# Altium PCB AT86RF231.PcbDoc
Units mil, origin at the board's own origin, x right, y up, seen from the top; angles counter-clockwise.
Board outline 1140 x 1310 mil, 2 copper layers (Top Layer, Bottom Layer); 16 components, 20 nets, 79 pads, 66 vias.
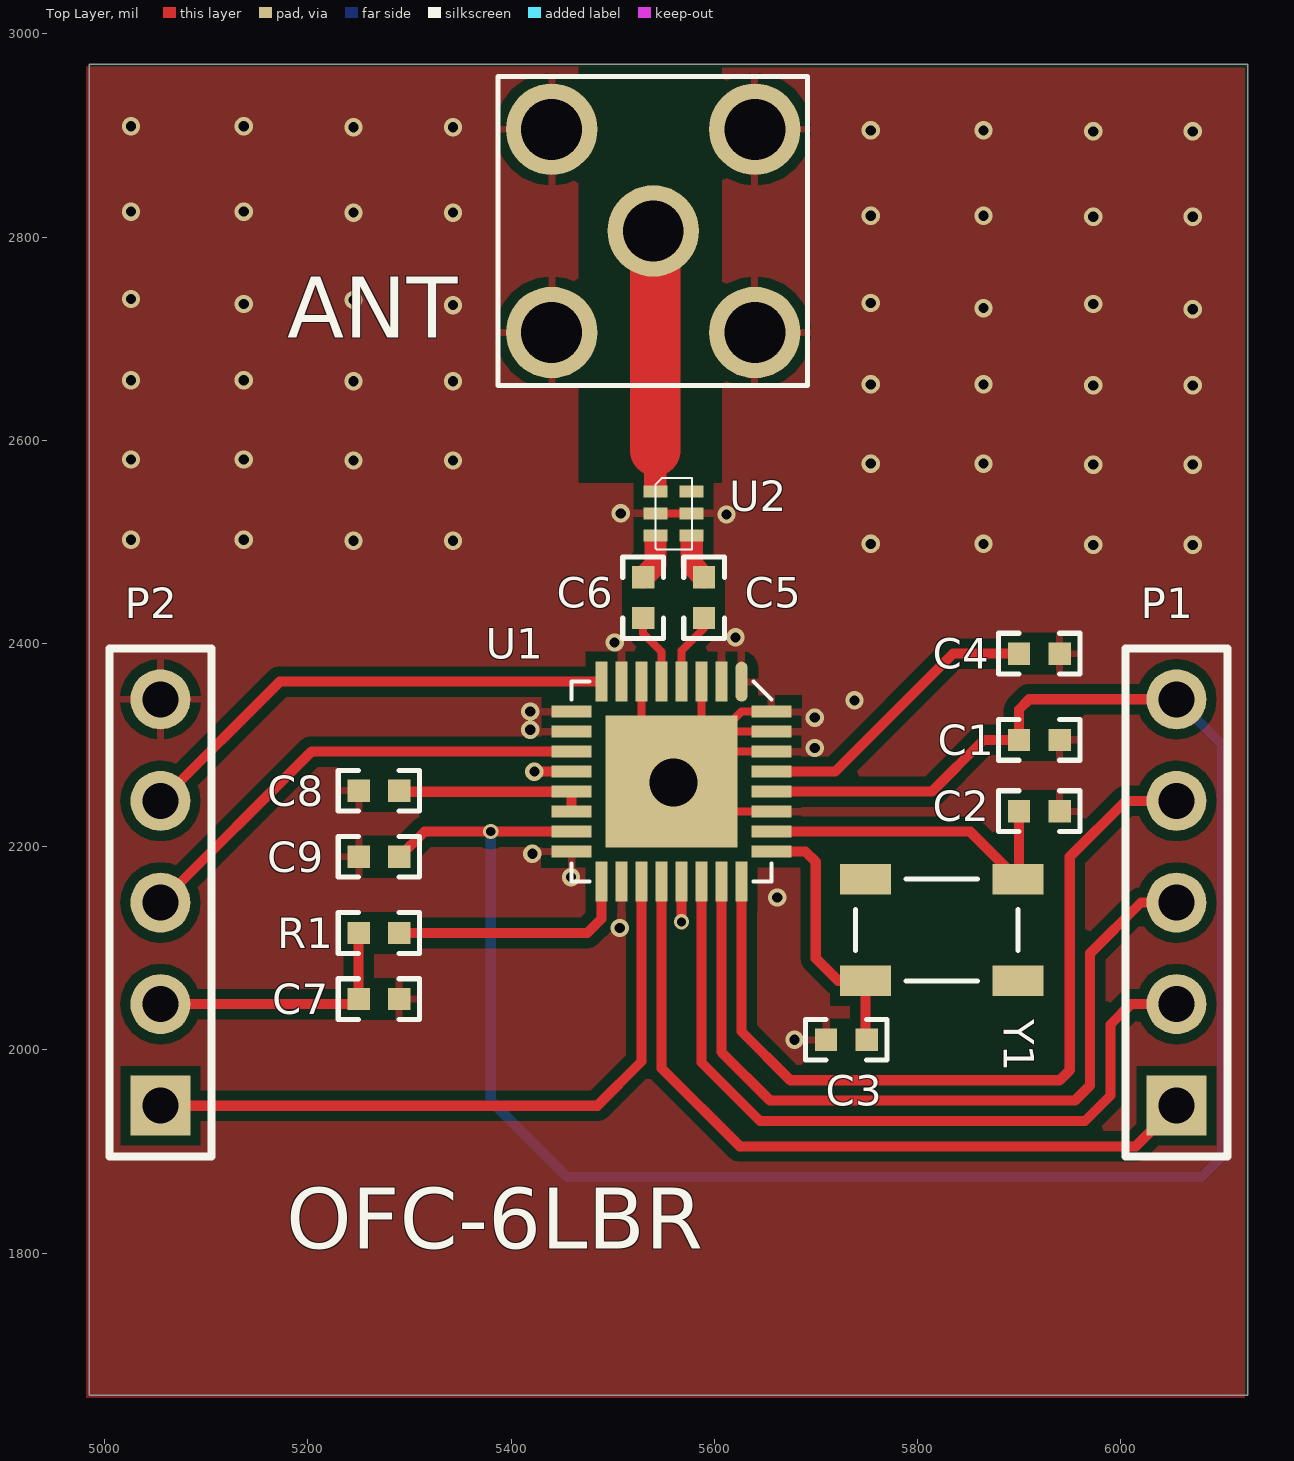
[diagram p0: Top Layer view]
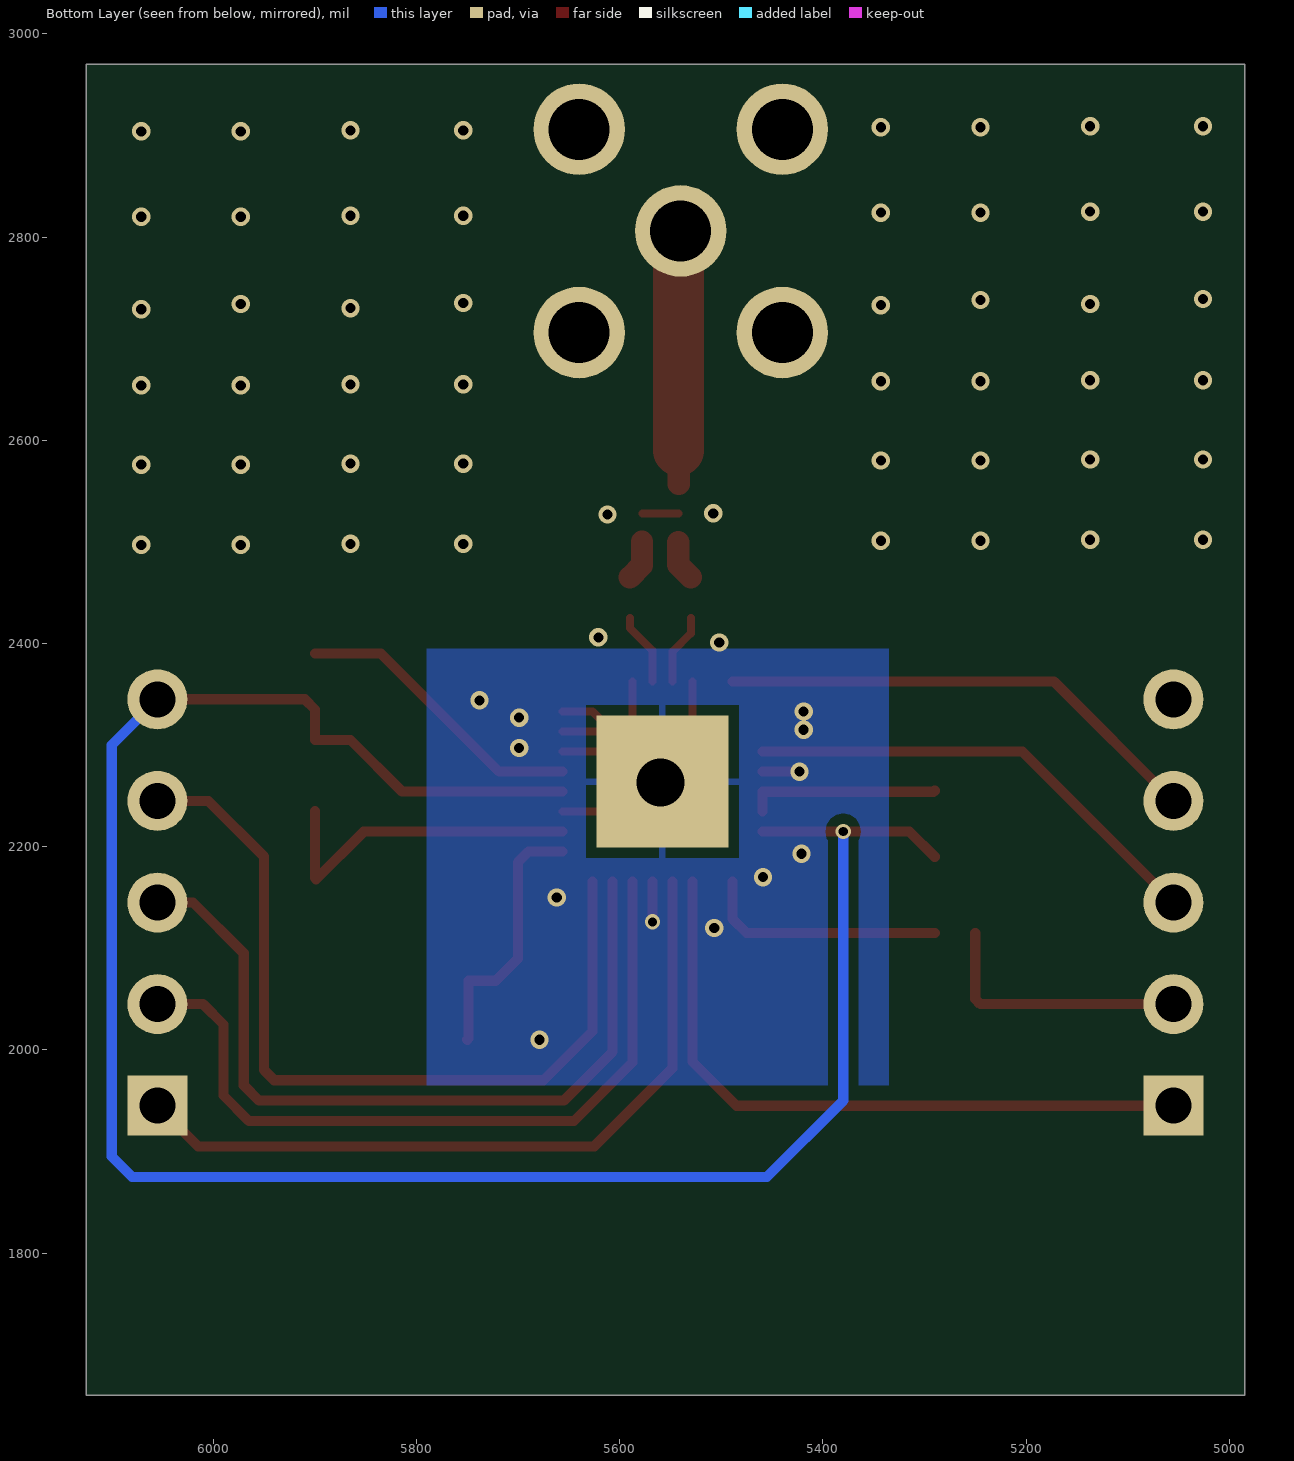
[diagram p1: Bottom Layer view, seen from below]

## Layer stack, top to bottom
Top Layer: signal copper 1.4
Dielectric: dielectric 12.6, FR-4, Dk 4.8
Bottom Layer: signal copper 1.4

## Board outline
4985,2970 4985,1660 6125,1660 6125,2970 4985,2970

## Design rules (kind name [scope] priority, off if disabled: settings)
Clearance OtherPoly [InPolygon] p1: gap=10
Clearance ANT_Poly [InNamedPolygon ('NetANT_1')] p2: gap=50
Clearance VCC3.3 [InNamedPolygon ('VCC3.3')] p3: gap=19.68
Clearance [All] p4: gap=4
ComponentClearance [All] p1 off: gap=3.94 collisioncheckmode=3 verticalgap=3.94 showdistances=FALSE
HoleSize [All] p1: absolutevalues=TRUE maxlimit=200 minlimit=1 maxpercent=80.000 minpercent=20.000
HoleToHoleClearance [All] p1: gap=1 allowstackedmicrovias=TRUE
MinimumSolderMaskSliver [All] p1: minsoldermaskwidth=1
PlaneConnect [All] p1: planeconnectstyle=Relief reliefexpansion=20 reliefentries=4 reliefconductorwidth=5 reliefairgap=10
PolygonConnect GND-Via [IsVia] p1: connectstyle=Direct reliefconductorwidth=10 reliefentries=4 polygonreliefangle="90 Angle"
PolygonConnect [All] p2: connectstyle=Relief reliefconductorwidth=7 reliefentries=4 polygonreliefangle="90 Angle"
RoutingVias [All] p1: holewidth=28 width=50 viastyle="Through Hole" minholewidth=2 minwidth=5 maxholewidth=50 maxwidth=150
SilkToSilkClearance [All] p1: silktosilkclearance=0.1
SilkscreenOverComponentPads [All] p1: minsilkscreentomaskgap=0
SolderMaskExpansion [All] p1: expansion=4
TestPointUsage [All] p1: valid=0 allowmultiple=FALSE
Testpoint [All] p1: side=15 testpointundercomponent=TRUE minsize=40 maxsize=100 preferedsize=60 minholesize=0 maxholesize=40 preferedholesize=32 testpointgrid=1 style=1023 order=0-112345678
Width [All] p1: maxlimit=196.85 minlimit=4 preferedwidth=7
17 further rules are at their usual default settings.

## Components (designator, comment, footprint, x,y, rotation, side; value= is the part's Value field where it differs from the comment)
ANT "SMA" ANT 5540,2806 r0 top
C1 "1uF" 0402 5940,2305 r180 top
C2 "12pF" 0402 5940,2235 r180 top
C3 "12pF" 0402 5710,2010 r0 top
C4 "1uF" 0402 5940,2390 r180 top
C5 "22pF" 0402 5590,2465 r270 top
C6 "22pF" 0402 5530,2465 r270 top
C7 "2.2pF" 0402 5290,2050 r180 top
C8 "1uF" 0402 5250,2255 r0 top
C9 "1uF" 0402 5250,2190 r0 top
P1 "Header 5" HDR1X5 6055,1945 r90 top
P2 "Header 5" HDR1X5 5055,1945 r90 top
R1 "680" 0402 5290,2115 r180 top
U1 "AT86RF231" AT86 5560,2260 r270 top
U2 "HHM1711D1" HHM1711D1 5540,2550 r0 top
Y1 "XTAL" XTAL_5032_SMD 5820,2115 r180 top

## Footprints (in the part's own frame and the unit in brackets; to place one, negate y for a bottom-side part, rotate by r counter-clockwise, add the part's x,y. Pads: shape width x height; smd on the part's side, far side on the other; paste and mask are expansions set on the pad)
0402 [mil]
  rect 22x22 smd: 1(0,0) 2(40,0)
  silkscreen extent -20,-20 60,20
ANT [mil]
  round 90 hole 60: 1(0,0) 2(-100,-100) 2(-100,100) 2(100,-100) 2(100,100)
  silkscreen extent -153,-152 152,152
AT86 [mm]
  oval 1x0.3 smd: 1(-2.602,1.699)
  rect 1x0.3 smd: 2(-2.602,1.199) 3(-2.602,0.699) 4(-2.602,0.199) 5(-2.602,-0.301) 6(-2.602,-0.801) 7(-2.602,-1.301) 8(-2.602,-1.801) 17(2.398,-1.801) 18(2.398,-1.301) 19(2.398,-0.801) 20(2.398,-0.301) 21(2.398,0.199) 22(2.398,0.699) 23(2.398,1.199) 24(2.398,1.699)
  rect 0.3x1 smd: 9(-1.852,-2.551) 10(-1.352,-2.551) 11(-0.852,-2.551) 12(-0.352,-2.551) 13(0.148,-2.551) 14(0.648,-2.551) 15(1.148,-2.551) 16(1.648,-2.551) 25(1.648,2.449) 26(1.148,2.449) 27(0.648,2.449) 28(0.148,2.449) 29(-0.352,2.449) 30(-0.852,2.449) 31(-1.352,2.449) 32(-1.852,2.449)
  rect 3.3x3.3 smd: 33(-0.102,-0.051)
  rect 3.3x3.3 smd far side: 34(-0.102,-0.051)
  silkscreen extent -2.6,-2.55 2.4,2.45
HDR1X5 [mm] "Connector; Header; 5 Position"
  rect 1.5x1.5 hole 0.9: 1(0,0)
  round 1.5 hole 0.9: 2(2.54,0) 3(5.08,0) 4(7.62,0) 5(10.16,0)
  silkscreen extent -1.27,-1.27 11.43,1.27
HHM1711D1 [mm]
  rect 0.6x0.3 smd: 1(0.058,-0.009) 2(0.058,-0.559) 3(0.058,-1.109) 4(0.958,-1.109) 5(0.958,-0.559) 6(0.958,-0.018)
  Top Layer region: 0.496,-0.018 0.496,-0.018 0.496,-0.018 0.496,-0.018
  silkscreen extent 0.06,-1.46 0.97,0.32
XTAL_5032_SMD [mil]
  rect 50x30 smd: 0(-78.9,47.05) 0(71.1,-52.95) 1(-78.9,-52.95) 2(71.1,47.05)
  silkscreen extent -79,-53 81,47

## Part data
ANT: library part SMB, "SMB Straight Connector"
C1 C2 C3 C4 C5 C6 C7 C8 C9: library part Cap, "Capacitor"
P1 P2: "Header, 5-Pin"
R1: library part Res2, "Resistor"
U2: "HHM1711D1 For Bluetooth & IEEE802.11b/g"
Y1: "Crystal Oscillator"

## Via types
v1: diameter 18, hole 10, Top Layer to Bottom Layer, 63 vias
v2: diameter 15, hole 9, Top Layer to Bottom Layer, 2 vias
v3: diameter 102.36, hole 47.24, Top Layer to Bottom Layer, 1 vias

## Nets (pads, with @x,y where several pads share a name; then routed paths per layer and width w, separated by ;. In a path a pad name is that pad's centre, name@x,y a point inside that pad or via, vN(x,y) a via of type N, cw(c..) or ccw(c..) an arc to the next point about the centre after c; other vN are vias at no path point)
GND: ANT.2 C1.1 C2.1 C3.1 C4.1 C7.1 C8.1 C9.1 P2.5 U1.1 U1.2 U1.3 U1.6 U1.7 U1.9 U1.10 U1.12 U1.16 U1.18 U1.21 U1.27 U1.30 U1.31 U1.32 U1.33 U1.34 U2.2 U2.5 | length 619
  Top Layer w7.87: U1.6 5528.47,2293.53 U1.33 ; U2.2 U2.5 ; U1.3 U1.33@5587.53,2293.53 ; U1.27 5587.53,2234.47 U1.33 ; U1.30 U1.33@5587.53,2293.53 ; U1.31 5607.21,2313.21 5626.9,2332.9 U1.32 ; U1.33 U1.33@5587.53,2293.53
  Top Layer w10: v1(5423,2273.84) U1.12 ; v2(5567.84,2126) U1.21
  other v1: 5679,2010 5507,2120 5662,2150 5459,2170 5421,2193 5699,2297 5419,2315 5699,2327 5419,2333 5738,2344 5502,2401 5621,2406 5973,2497 6071,2497 5754,2498 5865,2498 5245,2501 5343,2501 5026,2502 5137,2502 5612,2527 5508,2528 5973,2576 6071,2576 5754,2577 5865,2577 5245,2580 5343,2580 5026,2581 5137,2581 5973,2654 6071,2654 5754,2655 5865,2655 5245,2658 5343,2658 5026,2659 5137,2659 6071,2729 5865,2730 5343,2733 5137,2734 5973,2734 5754,2735 5245,2738 5026,2739 5973,2820 6071,2820 5754,2821 5865,2821 5245,2824 5343,2824 5026,2825 5137,2825 5973,2904 6071,2904 5754,2905 5865,2905 5245,2908 5343,2908 5026,2909 5137,2909
  other v3: 5560,2263
NetANT_1: ANT.1 U2.1 | length 249
  Top Layer w22: 5542,2557 5542,2590
  Top Layer w50: 5542,2590 ANT.1@5542,2806
NetC4_2: C4.2 U1.29 | length 291.7
  Top Layer w10: U1.29 5718.84,2273.84 5835,2390 C4.2
NetC5_1: C5.1 U2.4 | length 40
  Top Layer w22: 5578,2500 5578,2477 C5.1
NetC6_1: C6.1 U2.3 | length 39.8
  Top Layer w22: C6.1 5542.28,2477.28 5542.28,2499.72
NetC8_2: C8.2 U1.13 U1.14 | length 189.7
  Top Layer w10: C8.2 5291,2254 5459.42,2254 U1.13 U1.14
NetR1_1: R1.1 U1.17 | length 241.4
  Top Layer w10: R1.1 5475,2115 5489.1,2129.1 U1.17
RF_/RST: P2.4 U1.8 | length 482.7
  Top Layer w10: P2.4 5172.43,2362.43 U1.8
RF_/SEL: P1.3 U1.23 | length 792.3
  Top Layer w10: U1.23 5607.21,1997.79 5655,1950 5955,1950 5970,1965 5970,2095 6020,2145 P1.3
RF_CLKM: C7.2 P2.2 R1.2 | length 262.1
  Top Layer w10: P2.2 5245,2045 C7.2 R1.2
RF_IRQ: P1.4 U1.24 | length 832.4
  Top Layer w10: U1.24 5626.9,2018.1 5675,1970 5940,1970 5950,1980 5950,2190 6005,2245 P1.4
RF_MISO: P1.1 U1.20 | length 739
  Top Layer w10: U1.20 5548.16,1981.84 5625,1905 6015,1905 P1.1
RF_MOSI: P1.2 U1.22 | length 758
  Top Layer w10: U1.22 5587.53,1987.47 5645,1930 5965,1930 5990,1955 5990,2025 6010,2045 P1.2
RF_SCLK: P2.1 U1.19 | length 668.6
  Top Layer w10: P2.1 5485,1945 5528.47,1988.47 U1.19
RF_SLP_TR: P2.3 U1.11 | length 466.1
  Top Layer w10: P2.3 5203.53,2293.53 U1.11
RF_XTAL1: C2.2 U1.26 Y1.1 | length 329.4
  Top Layer w10: U1.26 5852.06,2214.79 Y1.1 5900,2169.06 C2.2
RF_XTAL2: C3.2 U1.25 Y1.2 | length 259.2
  Top Layer w10: U1.25 5689.9,2195.1 5700,2185 5700,2090 5722.05,2067.95 Y1.2 5748.9,2011.1 C3.2
RFN: C6.2 U1.5 | length 70.1
  Top Layer w7.87: C6.2 5530,2410 5548.16,2391.84 U1.5
RFP: C5.2 U1.4 | length 71.8
  Top Layer w7.87: U1.4 5567.84,2392.84 5590,2415 C5.2
VCC3.3V: C1.2 C9.2 P1.5 U1.15 U1.28 | length 2126.4
  Top Layer w10: C9.2 5314.79,2214.79 U1.15 ; U1.28 5814.16,2254.16 5865,2305 C1.2 5900,2335 5910,2345 P1.5
  Bottom Layer w10: v2(5380,2214.79) 5380,1950 5455,1875 6080,1875 6100,1895 6100,2300 P1.5
pads on no net: U2.6 Y1.0

## Polygon pours and split planes (outlines as drawn)
GND on Top Layer "Top Layer-No Net" (solid, remove dead copper, pour order 1000): 4982,2967.59 4982,1657.59 6122,1657.59 6122,2967.59 6121,2966.59 5608,2966.59 5608,2558.59 5607,2557.59 5472,2557.59 5467,2557.59 5466,2558.59 5466,2967.59 4982,2967.59
GND on Bottom Layer "Top Layer-No Net" (solid, remove dead copper, pour order 1001): 5585,2395 5790,2395 5790,1965 5335,1965 5335,2395 5585,2395

## Silkscreen, mask and mechanical layers (free items; w line width, h text height)
Top Overlay:
  text "OFC-6LBR" at 5179,1804 h60
Mechanical 1:
  lines w7: 4628,1651 4975,1651 4975,1369
  lines w10: 4807.14,1722.05 4827,1662 ; 4809.86,2915.05 4830,2975 ; 4817,1662.02 4837,1661.98 ; 4820,2975.02 4840,2974.98 ; 4827.62,1932.62 4827,1662 ; 4829.38,2704.38 4830,2975 ; 4847.14,1721.95 4827,1662 ; 4849.86,2914.95 4830,2975 ; 4989.94,1489.81 4989.94,1509.81 ; 5049.94,1479.82 4989.94,1499.81 ; 5049.93,1519.82 4989.94,1499.81 ; 5174.09,1499.84 4989.94,1499.81 ; 5945.85,1499.97 6130,1500 ; 6070,1479.99 6130,1500 ; 6070,1519.99 6130,1500 ; 6130,1490 6130,1510 ; 4980,1655 4980,2973 6128,2973 6128,1655 4980,1655
  text "1313.003 (mil)" at 4863.63,1942.54 h60 r89.87
  text "1140.063 (mil)" at 5184.09,1463.85 h60 r0.01